# EAGLE board Display_Node (EAGLE 7.2.0)
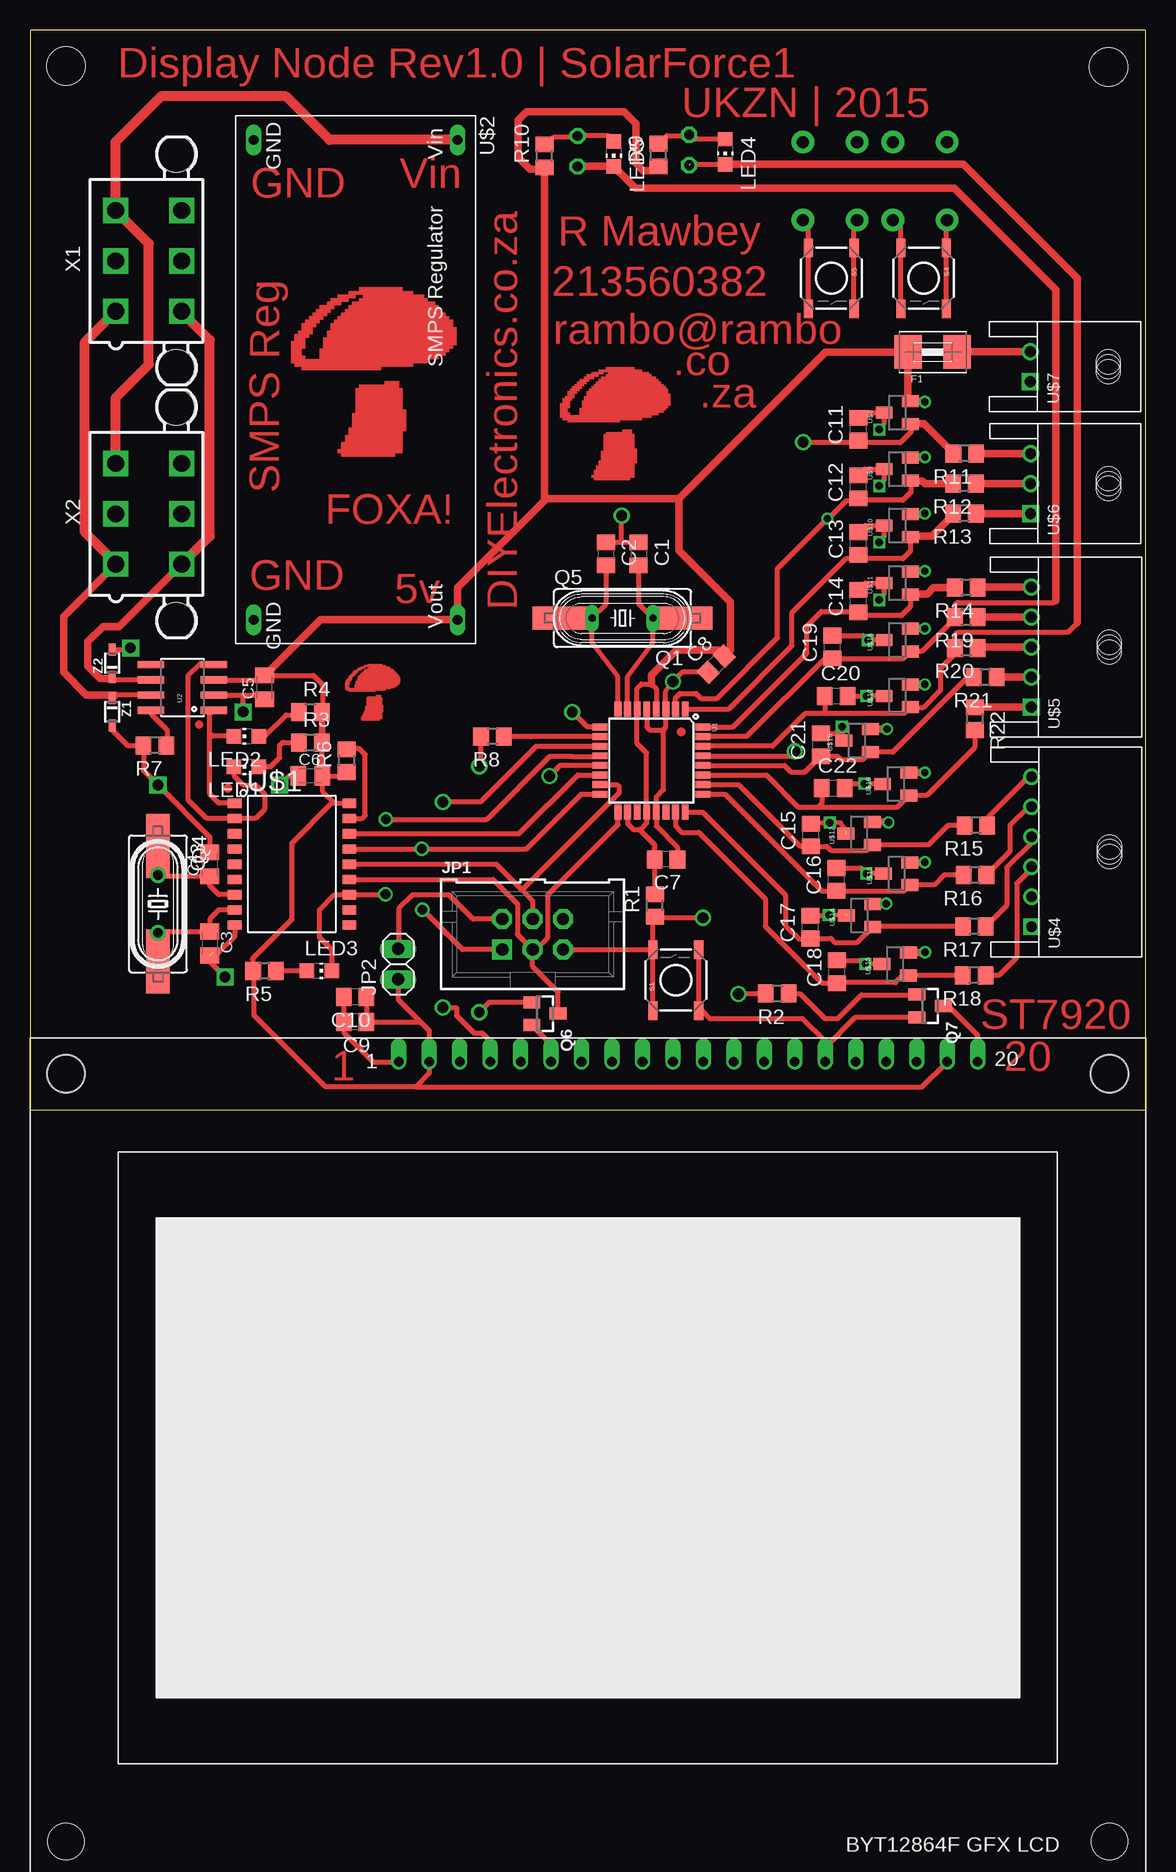
[diagram p0: board, top side]
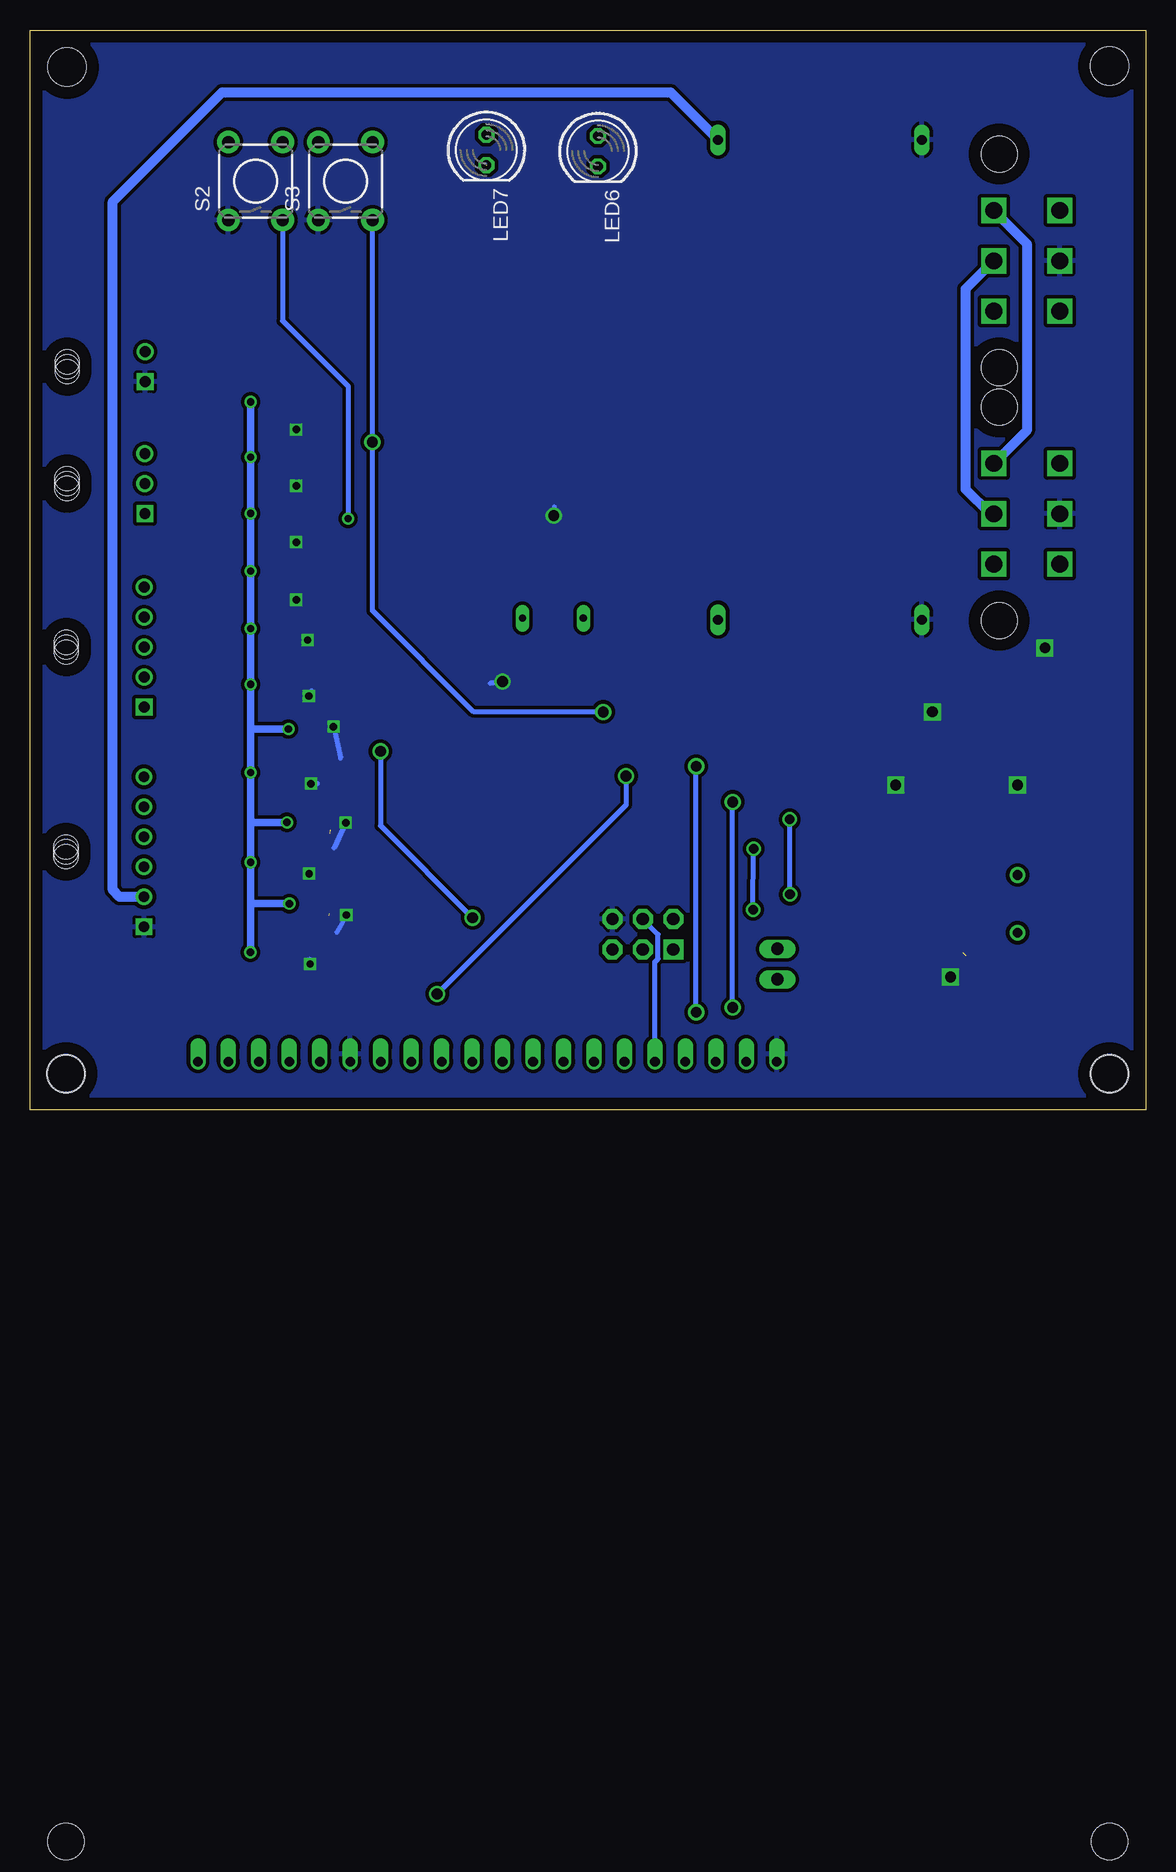
[diagram p1: board, bottom side, seen from below]

Size 93 x 90 mm. Coordinates in mm from the lower left corner, seen from the top.
Outline: 0,0 93,0 93,90 0,90 0,0
Copper layers (1*16): Top 0.035mm / dielectric 1.5mm / Bottom 0.035mm
Design rules "default": minimum track width 10mil, minimum drill 24mil, track to track 8mil, track to pad 8mil, pad to pad 8mil, via to via 8mil, smd to smd 8mil, copper to edge 40mil, drill to drill 8mil, minimum pad ring 10mil, minimum via ring 8mil, stop-mask expansion 4mil, vias tented up to drill 0mil, thermal gap 10mil
Holes 3.2 mm at 3,3 3,87 89.9,86.9 90,3

## Footprints (pad centres in the part's own frame; a part is rotated, then mirrored left to right if it is on the bottom)
C0805 = smd 1.3 x 1.5: 1 -0.95,0; 2 0.95,0
C0805K = smd 1.3 x 1.6: 1 -1,0; 2 1,0
1812 = smd 2.286 x 2.794: 1 -2.046,0; 2 2.046,0
HDR-75869-131 = drill 1.016 pad 1.676 square: 1 -2.54,-1.27 | drill 1.016 pad 1.676 octagon: 2 -2.54,1.27; 3 0,-1.27; 4 0,1.27; 5 2.54,-1.27; 6 2.54,1.27
1X02 = drill 1.016 long: 1 -1.27,0; 2 1.27,0
CHIP-LED0805 = smd 1.2 x 1.2: A 0,-1.05; C 0,1.05
LED5MM = drill 0.813 octagon: A -1.27,0; K 1.27,0
QS = drill 0.61 long: 1 -2.54,0; 2 2.54,0
HC49/S = drill 0.813: 1 -2.413,0; 2 2.413,0
HC49UP = smd 5.334 x 1.93: 1 -4.826,0; 2 4.826,0
SOT23 = smd 1 x 1.4: 1 -0.95,-1.1; 2 0.95,-1.1; 3 0,1.1
R0805 = smd 1.3 x 1.5: 1 -0.95,0; 2 0.95,0
TACTILE_SWITCH_SMD = smd 1.524 x 0.762: 1 -2.54,1.905; 2 2.54,1.905; 3 -2.54,-1.905; 4 2.54,-1.905
TACTILE-PTH = drill 1.016 pad 1.88: 1 -3.251,2.261; 2 3.251,2.261; 3 -3.251,-2.261; 4 3.251,-2.261
TQFP32-08 = smd 1.27 x 0.559: 1 -4.293,2.8; 2 -4.293,2; 3 -4.293,1.2; 4 -4.293,0.4; 5 -4.293,-0.4; 6 -4.293,-1.2; 7 -4.293,-2; 8 -4.293,-2.8; 17 4.293,-2.8; 18 4.293,-2; 19 4.293,-1.2; 20 4.293,-0.4; 21 4.293,0.4; 22 4.293,1.2; 23 4.293,2; 24 4.293,2.8 | smd 0.559 x 1.27: 9 -2.8,-4.293; 10 -2,-4.293; 11 -1.2,-4.293; 12 -0.4,-4.293; 13 0.4,-4.293; 14 1.2,-4.293; 15 2,-4.293; 16 2.8,-4.293; 25 2.8,4.293; 26 2,4.293; 27 1.2,4.293; 28 0.4,4.293; 29 -0.4,4.293; 30 -1.2,4.293; 31 -2,4.293; 32 -2.8,4.293
SO08 = smd 0.61 x 2.21: 1 -1.905,-2.616; 2 -0.635,-2.616; 3 0.635,-2.616; 4 1.905,-2.616; 5 1.905,2.616; 6 0.635,2.616; 7 -0.635,2.616; 8 -1.905,2.616
SO-18W = smd 0.762 x 1.143: 1 -5.08,-4.788; 2 -3.81,-4.788; 3 -2.54,-4.788; 4 -1.27,-4.788; 5 0,-4.788; 6 1.27,-4.788; 7 2.54,-4.788; 8 3.81,-4.788; 9 5.08,-4.788; 10 5.08,4.788; 11 3.81,4.788; 12 2.54,4.788; 13 1.27,4.788; 14 0,4.788; 15 -1.27,4.788; 16 -2.54,4.788; 17 -3.81,4.788; 18 -5.08,4.788
SMPSBOARD = drill 0.8 long: GND 2,1.5; GND@ 42,1.5; VIN 2,18.5; VOUT 42,18.5
BYT12864F = drill 0.8 offset: P$1 14,2; P$2 16.54,2; P$3 19.08,2; P$4 21.62,2; P$5 24.16,2; P$6 26.7,2; P$7 29.24,2; P$8 31.78,2; P$9 34.32,2; P$10 36.86,2; P$11 39.4,2; P$12 41.94,2; P$13 44.48,2; P$14 47.02,2; P$15 49.56,2; P$16 52.1,2; P$17 54.64,2; P$18 57.18,2; P$19 59.72,2; P$20 62.26,2 | hole 3: 3,3; 90,3; 90,67; 3,67
1744426-6 = drill 0.9 square: P$1 -6.25,6.5 | drill 0.9: P$2 -3.75,6.5; P$3 -1.25,6.5; P$4 1.25,6.5; P$5 3.75,6.5; P$6 6.25,6.5 | hole 2: 0,0; -0.4,0; 0.4,0
1744426-5 = drill 0.9 square: P$1 -5,6.5 | drill 0.9: P$2 -2.5,6.5; P$3 0,6.5; P$4 2.5,6.5; P$5 5,6.5 | hole 2: 0,0; -0.4,0; 0.4,0
1744426-3 = drill 0.9 square: P$1 -2.5,6.5 | drill 0.9: P$2 0,6.5; P$3 2.5,6.5 | hole 2: 0,0; -0.4,0; 0.4,0
1744426-2 = drill 0.9 square: P$1 -1.25,6.5 | drill 0.9: P$2 1.25,6.5 | hole 2: 0,0; -0.4,0; 0.4,0
5566-6 = drill 1.4 square: 1 4.2,-2.75; 2 0,-2.75; 3 -4.2,-2.75; 4 4.2,2.75; 5 0,2.75; 6 -4.2,2.75 | hole 3: 8.9,2.29; -8.9,2.29
SOD323 = smd 1 x 0.6: A 1.143,0; C -1.143,0

## Placement (x,y rotation side)
C1  22pF  [C0805]  50.75,46.33 270 top
C2  22pF  [C0805]  48.01,46.33 270 top
C3  22pF  [C0805K]  14.99,13.86 270 top
C4  22pF  [C0805K]  14.99,20.46 90 top
C5  100nF  [C0805K]  19.56,35.19 90 top
C6  100nF  [C0805K]  23.37,27.83 0 top
C7  100nF  [C0805]  53.02,20.88 180 top
C8  100nF  [C0805]  57.21,37.14 45 top
C9  100nF  [C0805]  27.1,7.3 180 top
C10  10uF  [C0805]  27.1,9.4 180 top
C11  10nF  [C0805]  69.05,56.73 90 top
C12  10nF  [C0805]  69.05,51.92 90 top
C13  10nF  [C0805]  69.08,47.2 90 top
C14  10nF  [C0805]  69.08,42.4 90 top
C15  10nF  [C0805]  65.1,22.9 90 top
C16  10nF  [C0805]  67.22,19.2 90 top
C17  10nF  [C0805]  65.05,15.22 90 top
C18  10nF  [C0805]  67.28,11.5 90 top
C19  10nF  [C0805]  66.9,38.58 90 top
C20  10nF  [C0805]  67.2,34.5 0 top
C21  10nF  [C0805]  65.92,30.43 90 top
C22  10nF  [C0805]  66.95,26.8 0 top
F1  [1812]  75.26,63.15 0 top
JP1  AVRISP6  [HDR-75869-131]  41.91,14.62 0 top
JP2  [1X02]  30.69,12.14 90 top
LED1  RX  [CHIP-LED0805]  18.03,28.59 90 top
LED2  TX  [CHIP-LED0805]  18.03,31.13 90 top
LED3  INT  [CHIP-LED0805]  24.13,11.57 270 top
LED4  [CHIP-LED0805]  57.97,79.84 180 top
LED5  [CHIP-LED0805]  48.68,79.67 180 top
LED6  [LED5MM]  45.65,79.9 270 bottom
LED7  [LED5MM]  54.95,80 270 bottom
Q1  16MHz  [QS]  49.4,40.97 180 top
Q3  16MHz  [HC49/S]  10.67,17.16 270 top
Q4  16MHz  [HC49UP]  10.67,17.16 270 top
Q5  16MHz  [HC49UP]  49.4,40.97 0 top
Q6  2N7002  [SOT23]  42.93,8 270 top
Q7  2N7002  [SOT23]  75.05,8.64 270 top
R1  50k  [R0805]  52.09,17.02 90 top
R2  100E  [R0805]  62.3,9.67 180 top
R3  1k  [R0805]  23.37,30.62 0 top
R4  1k  [R0805]  23.37,33.16 0 top
R5  1k  [R0805]  19.56,11.57 180 top
R6  100k  [R0805]  26.42,29.1 90 top
R7  100k  [R0805]  10.41,30.37 180 top
R8  100E  [R0805]  38.56,31.11 180 top
R9  1k  [R0805]  52.39,79.58 90 top
R10  1k  [R0805]  42.88,79.49 90 top
R11  470E  [R0805]  77.92,54.7 180 top
R12  470E  [R0805]  77.9,52.2 180 top
R13  470E  [R0805]  77.9,49.7 180 top
R14  470E  [R0805]  78.05,43.52 180 top
R15  470E  [R0805]  78.85,23.7 180 top
R16  470E  [R0805]  78.78,19.55 180 top
R17  470E  [R0805]  78.72,15.28 180 top
R18  470E  [R0805]  78.7,11.2 180 top
R19  470E  [R0805]  78.05,41.05 180 top
R20  470E  [R0805]  78.05,38.5 180 top
R21  470E  [R0805]  79.62,36.05 180 top
R22  470E  [R0805]  78.75,32.6 270 top
S1  RESET  [TACTILE_SWITCH_SMD]  53.85,10.79 90 top
S2  SWITCH-MOMENTARY-2PTH  [TACTILE-PTH]  74.2,77.4 90 bottom
S3  SWITCH-MOMENTARY-2PTH  [TACTILE-PTH]  66.7,77.4 90 bottom
S4  BTN3  [TACTILE_SWITCH_SMD]  74.5,69.3 270 top
S5  BTN4  [TACTILE_SWITCH_SMD]  66.8,69.3 270 top
U1  ATMEGA328P_TQFP  [TQFP32-08]  51.82,29.1 270 top
U2  MCP2551  [SO08]  12.7,35.19 90 top
U$1  MCP2515SO  [SO-18W]  21.84,20.46 270 top
U$2  SMPSBOARD  [SMPSBOARD]  17.14,82.84 270 top
U$3  BYT12864FLCD  [BYT12864F]  93,6 180 top
U$4  HEADER-6WAY  [1744426-6]  90,21.5 90 top
U$5  HEADER-5WAY  [1744426-5]  89.97,38.55 90 top
U$6  HEADER-3WAY  [1744426-3]  89.92,52.2 90 top
U$7  HEADER-2WAY  [1744426-2]  89.89,61.93 90 top
U$8  DRTR5V0U1SO  [SOT23]  72.3,58.1 90 top
U$9  DRTR5V0U1SO  [SOT23]  72.3,53.4 90 top
U$10  DRTR5V0U1SO  [SOT23]  72.3,48.7 90 top
U$11  DRTR5V0U1SO  [SOT23]  72.3,43.9 90 top
U$12  DRTR5V0U1SO  [SOT23]  69.12,23.02 90 top
U$13  DRTR5V0U1SO  [SOT23]  72.25,19.68 90 top
U$14  DRTR5V0U1SO  [SOT23]  69.15,16.2 90 top
U$15  DRTR5V0U1SO  [SOT23]  72.12,12.15 90 top
U$16  DRTR5V0U1SO  [SOT23]  72.3,39.15 90 top
U$17  DRTR5V0U1SO  [SOT23]  72.3,34.5 90 top
U$18  DRTR5V0U1SO  [SOT23]  68.95,30.77 90 top
U$19  DRTR5V0U1SO  [SOT23]  72.17,27.15 90 top
X1  5566-6  [5566-6]  9.91,70.75 270 top
X2  5566-6  [5566-6]  9.91,49.67 270 top
Z1  TVS-UD-SOD323  [SOD323]  6.86,33.16 270 top
Z2  TVS-UD-SOD323  [SOD323]  6.86,37.23 90 top

## Library data of the parts
C1-C22 R1-R22 = resistor
F1 = adafruit
JP1 = atmel-avr
JP2 = pinhead
LED1-LED7 = led
Q1 = special
Q3 = crystal; OC_FARNELL: 1667008; OC_NEWARK: unknown
Q4 Q5 = crystal; OC_FARNELL: unknown; OC_NEWARK: unknown
Q6 Q7 = transistor-fet
S1-S5 U2 = SparkFun
U1 = SparkFun-DigitalIC; PROD_ID: IC-09069
U$1-U$3 U$8-U$19 = RobThePyro
U$4-U$7 = con-TE-EP
X1 X2 = con-molex; MPN: 95566-61002; OC_FARNELL: unknown; OC_NEWARK: 22K8620
Z1 Z2 = supressor

## Nets
+5V: C5.2 C6.2 C7.2 C8.2 C9.1 C10.1 F1.1 JP2.1 R1.2 R3.2 R4.2 R5.2 R6.1 R9.1 R10.1 U1.4 U1.6 U1.18 U1.20 U2.3 U$1.18 U$2.VOUT U$3.P$2 U$3.P$19 U$8.2 U$9.2 U$10.2 U$11.2 U$12.2 U$13.2 U$14.2 U$15.2 U$16.2 U$17.2 U$18.2 U$19.2
+12V: U$2.VIN U$4.P$2 X1.3 X2.3
A0: C22.1 R22.2 U1.27 U$19.1
A1: C21.1 R21.2 U1.28 U$18.1
BTN1: C14.1 R14.2 U1.32 U$11.1
BTN2: C13.1 R13.2 U1.1 U$10.1
BTN3: C12.1 R12.2 S2.3 S4.3 S4.4 U1.2 U$9.1
BTN4: C11.1 R11.2 S3.3 S5.3 S5.4 U1.9 U$8.1
CANCS: U1.14 U$1.16
CANH: U2.7 X1.1 X2.1 Z1.C
CANINT: LED3.C U1.12 U$1.12
CANL: U2.6 X1.4 X2.4 Z2.C
CANRST: R6.2 U$1.17
CANSTBY: R7.1 U2.8
CRUISE1: C18.1 R18.2 U1.23 U$15.1
CRUISE2: C17.1 R17.2 U1.24 U$14.1
CRUISE3: C16.1 R16.2 U1.25 U$13.1
CRUISE4: C15.1 R15.2 U1.26 U$12.1
GND: C1.1 C2.1 C3.2 C4.2 C5.1 C6.1 C7.1 C8.1 C9.2 C10.2 C11.2 C12.2 C13.2 C14.2 C15.2 C16.2 C17.2 C18.2 C19.2 C20.2 C21.2 C22.2 JP1.6 Q7.2 R7.2 S1.3 S1.4 S2.1 S3.1 S4.1 S4.2 S5.1 S5.2 U1.3 U1.5 U1.21 U2.2 U$1.9 U$2.GND U$2.GND@ U$3.P$6 U$3.P$20 U$4.P$1 U$7.P$1 U$8.3 U$9.3 U$10.3 U$11.3 U$12.3 U$13.3 U$14.3 U$15.3 U$16.3 U$17.3 U$18.3 U$19.3 X1.2 X2.2 Z1.A Z2.A
LCD_CS: U1.11 U$3.P$17
LCD_PWM: R2.2 U1.13
LCD_RST: U$3.P$4
LED1: C20.1 LED4.C LED7.K R20.2 U1.30 U$17.1
LED2: C19.1 LED5.C LED6.K R19.2 U1.31 U$16.1
MISO: JP1.1 U1.16 U$1.15
MOSI: JP1.4 U1.15 U$1.14 U$3.P$16
N$1: C1.2 Q1.1 Q5.2 U1.7
N$2: C2.2 Q1.2 Q5.1 U1.8
N$3: C3.1 Q3.2 Q4.2 U$1.8
N$4: Q7.3 U$3.P$1
N$5: Q7.1 R2.1
N$6: C4.1 Q3.1 Q4.1 U$1.7
N$7: LED1.A R3.1
N$8: LED2.A R4.1
N$9: LED3.A R5.1
N$10: JP1.2 JP2.2
N$11: Q6.2 U$3.P$15
N$12: Q6.1 R8.2
N$13: LED4.A LED7.A R9.2
N$14: X1.5 X2.5
N$15: X1.6 X2.6
N$16: LED5.A LED6.A R10.2
N$17: F1.2 U$7.P$2
N$18: R11.1 U$6.P$3
N$19: R12.1 U$6.P$2
N$20: R13.1 U$6.P$1
N$21: R14.1 U$5.P$5
N$22: R18.1 U$4.P$3
N$23: R17.1 U$4.P$4
N$24: R16.1 U$4.P$5
N$25: R15.1 U$4.P$6
N$26: R19.1 U$5.P$4
N$27: R20.1 U$5.P$3
N$28: R21.1 U$5.P$2
N$29: R22.1 U$5.P$1
RST: JP1.5 R1.1 S1.1 S1.2 U1.29
RXCAN: LED1.C U2.4 U$1.2
SCK: JP1.3 Q6.3 U1.17 U$1.13
SCKCNTRL: R8.1 U1.10
TXCAN: LED2.C U2.1 U$1.1

## Tracks (layer width: path | path; a pad name or v marks a point on that pad's centre or on a via)
+5V  (via drill 0.6)
  Top 0.406: U2.3 19.19,35.83 C5.2 23.64,36.19 24.38,35.45 24.38,31.2 R4.2 R3.2 24.32,27.88 C6.2 | 25.4,25.54 25.15,25.54 21.84,22.24 21.84,15.89 18.54,12.59 18.54,12.06 | 25.4,25.54 U$1.18 | C6.2 24.37,26.57 25.4,25.54 | C6.2 26.1,27.83 R6.1 | 18.54,12.06 18.54,11.64 R5.2 | 32.13,1.91 33.28,3.05 U$3.P$19 33.27,6.6 32.54,7.34 | 32.13,1.91 24.64,1.91 18.67,7.87 18.67,11.94 18.54,12.06 | 32.13,1.91 74.36,1.91 U$3.P$2 | JP2.1 30.69,9.18 32.54,7.34 | U1.4 52.22,35.08 51.82,35.48 50.98,35.48 50.62,35.13 U1.6 50.62,30.53 51.42,29.74 U1.20 51.44,24.79 51.44,23.88 50.93,23.37 50.8,23.37 | U1.18 49.82,23.84 50.29,23.37 50.8,23.37 | R1.2 52.09,21.85 | 52.09,21.85 52.09,22.08 50.8,23.37 | C10.1 C9.1 32.5,7.3 32.54,7.34 | 73.2,63.13 F1.1 | 73.2,59.25 U$8.2 | C7.2 52.08,21.84 52.09,21.85
  Top 0.61: C5.2 24.21,40.84 U$2.VOUT 35.65,43.52 42.88,50.76 | 42.88,50.76 43.05,50.93 54.1,50.93 | F1.1 66.32,63.15 54.1,50.93 | R9.1 52.74,78.28 51.12,78.28 50.5,78.9 50.5,82.2 49.5,83.2 41.4,83.2 40.7,82.5 40.7,79.4 41.7,78.4 42.74,78.4 R10.1 42.88,50.76 | 54.1,50.93 54.1,46.6 58.4,42.3 58.4,38.32 C8.2 57.39,38.3 53.9,38.3 51.82,36.22 51.82,35.48 | 73.2,63.13 73.2,59.25 | U$8.2 74.55,59.05 v74.6,59 | v74.6,54.4 73.45,54.4 U$9.2 | U$10.2 74.55,49.65 v74.6,49.7 | U$11.2 74.55,44.85 v74.6,44.9 | v74.6,40.1 U$16.2 | v74.6,35.45 U$17.2 | v74.6,28.1 U$19.2 | U$18.2 v71.45,31.73 | v74.6,20.62 U$13.2 | U$12.2 71.58,23.98 v71.58,23.95 | v74.62,13.12 73.42,13.12 U$15.2 | U$14.2 71.38,17.15 v71.38,17.18
  Bottom 0.61: v74.6,59 v74.6,54.4 v74.6,49.7 v74.6,44.9 v74.6,40.1 v74.6,35.45 74.6,31.73 | 74.6,31.73 v74.6,28.1 74.6,23.95 | v71.45,31.73 74.6,31.73 | 74.6,23.95 v74.6,20.62 74.62,20.62 74.62,17.18 | v71.58,23.95 74.6,23.95 | 74.62,17.18 v74.62,13.12 | v71.38,17.18 74.62,17.18
+12V
  Top 0.813: X2.3 7.16,59.37 9.91,62.12 9.91,72.2 X1.3 7.11,75 7.11,80.66 10.92,84.47 21.34,84.47 24.96,80.84 U$2.VIN
  Bottom 0.813: U$4.P$2 85.55,17.75 86.1,18.3 86.1,75.7 77,84.8 39.6,84.8 U$2.VIN
A0
  Top 0.406: R22.2 78.75,30.2 74.75,26.2 U$19.1 72.33,25.25 65.72,25.25 | U1.27 61.38,27.9 64.03,25.25 65.72,25.25 | C22.1 66,25.52 65.72,25.25
A1
  Top 0.406: R21.2 78.2,36.05 71.95,29.8 70.08,29.8 U$18.1 69.42,29.2 67.6,29.2 67.33,29.48 C21.1 64.6,28.15 63.45,28.15 62.9,28.7 U1.28
BTN1
  Top 0.406: U$11.1 73.4,41.95 72.62,41.17 69.58,41.17 69.3,41.45 C14.1 69,41.52 65.97,41.52 64.78,40.33 64.78,38.08 58.6,31.9 U1.32
  Top 0.61: R14.2 75.33,43.52 74.8,43 73.45,43 U$11.1
BTN2
  Top 0.406: U$10.1 73.4,46.58 72.95,46.12 72.95,46.1 72.78,45.92 69.4,45.92 | U1.1 58.25,33.4 63.52,38.67 63.52,41.42 68.03,45.92 69.4,45.92 | 69.4,45.92 C13.1
  Top 0.61: R13.2 76.95,49.55 75.2,47.8 73.45,47.8 U$10.1
BTN3  (via drill 0.6)
  Top 0.406: U1.2 53.82,34.32 54.2,34.7 55.52,34.7 55.95,34.27 57.25,34.27 62.33,39.35 62.33,45.12 v66.47,49.27 | S4.4 S4.3 72.59,73.49 S2.3 | 73.45,52.4 73.45,51.5 72.75,50.8 68.65,50.8 68.6,50.75 | 68.6,50.75 68.83,50.75 C12.1 | 68.6,50.75 68.03,50.75 66.53,49.25 66.5,49.27 v66.47,49.27 | 66.53,49.23 v66.47,49.27
  Top 0.61: R12.2 74.6,52.2 74.4,52.4 73.45,52.4 U$9.1
  Bottom 0.406: S2.3 71.94,65.76 66.47,60.3 v66.47,49.27 66.51,49.24
BTN4  (via drill 0.9, 0.9 pad 1.27)
  Top 0.406: U1.9 46.46,31.9 v45.21,33.15 | S5.4 S5.3 64.89,73.69 S3.3 | 73.45,57.2 73.45,56.5 72.55,55.6 69.22,55.6 | 69.22,55.6 C11.1 | 69.22,55.6 64.5,55.6 v64.45,55.65
  Top 0.61: R11.2 76.97,54.73 74.5,57.2 73.45,57.2 U$8.1
  Bottom 0.406: v45.21,33.15 56.01,33.15 56.01,33.16 64.45,41.6 v64.45,55.65 64.45,56.7 64.45,74.14 S3.3
CANCS
  Top 0.406: U1.14 45.67,27.9 40.77,23 U$1.16
CANH
  Top 0.406: U2.7 7.11,34.56 Z1.C
  Top 0.61: 7.11,34.56 4.7,34.56 2.79,36.46 2.79,41.11 X2.1
  Top 0.813: X2.1 7.16,45.56 4.57,48.15 4.57,63.97 X1.1
CANINT  (via drill 0.8)
  Top 0.406: LED3.C 25.18,13.32 24.13,14.37 24.13,16.65 25.4,17.92 U$1.12 28.85,17.92 v29.64,17.95 | U1.12 47.48,29.45 45.16,29.45 45.15,29.44 43.33,29.44 38.09,24.2 v29.67,24.2
  Bottom 0.406: v29.64,17.95 29.64,24.17 v29.67,24.2
CANL
  Top 0.406: U2.6 7.11,35.83 Z2.C
  Top 0.61: X2.4 7.46,40.27 6.1,40.27 4.83,39 4.83,36.97 5.84,35.96 6.73,35.96 Z2.C
  Top 0.813: X2.4 14.99,47.8 14.99,64.15 12.66,66.48 X1.4
CANRST
  Top 0.406: U$1.17 27.69,24.27 27.94,24.53 27.94,29.61 27.43,30.11 26.48,30.11 R6.2
CANSTBY
  Top 0.406: U2.8 10.08,32.98 11.43,31.64 11.43,30.43 R7.1
CRUISE1
  Top 0.406: R18.2 U$15.1 72.75,11.2 72.15,10.6 67.33,10.6 C18.1 67.25,10.57 66,10.57 61.3,15.28 61.3,17.57 55.75,23.12 54.33,23.12 53.82,23.63 U1.23
CRUISE2
  Top 0.406: R17.2 70.28,15.28 U$14.1 68.95,13.95 67.08,13.95 66.75,14.28 C17.1 65,14.22 64.12,14.22 62.98,15.38 62.98,17.9 56.07,24.8 U1.24
CRUISE3
  Top 0.406: R16.2 76.17,19.55 75.38,18.75 73.38,18.75 U$13.1 72.88,18.25 C16.1 | 66.92,18.25 C16.1 | U1.25 57.95,26.3 66,18.25 C16.1
CRUISE4
  Top 0.406: R15.2 76.53,23.7 74.9,22.07 U$12.1 69.78,21.62 66.78,21.62 66.45,21.95 C15.1 65.08,21.98 64.2,21.98 59.08,27.1 U1.26
GND  (via drill 0.6, 0.9 pad 1.27, 0.9 pad 1.42)  (3 unrouted)
  Top 0.406: U2.2 17.78,34.56 | 17.78,34.56 19.19,34.56 C5.1 | U$1.9 17.06,14.4 15.75,13.1 15.22,13.1 | Z1.A 6.86,31.64 8.13,30.37 R7.2 9.46,28.27 v10.67,27.07 14.99,22.75 C4.2 | C6.1 21.59,27.83 v20.83,27.07 | v17.78,33.16 17.78,34.56 | Z2.A 8.26,38.37 v8.38,38.5 | C3.2 14.99,12.33 v16.26,11.06 | C1.1 49.33,47.28 | 49.33,47.28 C2.1 | 66.29,5.21 66.29,5.71 64.39,7.62 56.64,7.62 56.01,8.26 S1.3 S1.4 | 66.29,5.21 U$3.P$6 | Q7.2 68.77,7.69 66.29,5.21 | U1.5 51.44,33.37 51.44,31.9 51.69,31.65 52.78,31.65 | 52.78,31.65 53.02,31.88 U1.3 52.96,33.45 52.96,34.8 53.47,35.69 v53.59,35.69 54.37,36.47 C8.1 | 49.33,47.28 v49.33,49.52 | 52.78,31.65 52.83,31.6 52.83,26.67 52.22,26.05 U1.21 52.22,23.63 53.98,21.88 C7.1 | S5.2 S5.1 68.7,73.89 S3.1 | S4.2 S4.1 76.41,74.09 S2.1 | C10.2 C9.2 26.15,6.45 28.6,4 U$3.P$20 | v70.8,56.7 71.2,57.2 U$8.3 69.47,58.1 C11.2 | U$9.3 71.2,53.1 | U$9.3 71.2,52.5 v70.8,52 | v70.8,47.3 71.2,47.8 U$10.3 69.62,48.7 C13.2 | v70.8,42.5 71.2,43 U$11.3 69.62,43.9 C14.2 | C12.2 69.58,53.4 U$9.3 | 67.65,31.77 v67.7,31.93 | 68,23.3 67.58,23.9 v66.67,23.93 66.17,23.95 C15.2 | 68.03,16.38 67.58,16.2 v66.62,16.23 66.58,16.18 C17.2 | U$13.3 v69.72,19.68 69.25,20.15 C16.2 | U$15.3 v69.65,12.15 69.35,12.45 C18.2 | v69.58,27.18 69.6,27.15 U$19.3 68.25,27.15 C22.2 | U$17.3 69.78,34.5 v69.75,34.48 69.72,34.5 C20.2 | U$16.3 v69.85,39.15 69.47,39.52 C19.2 | C21.2 65.75,31.35 67.12,31.35 v67.7,31.93 | U$18.3 67.85,31.14 67.59,31.41 67.59,31.81 v67.7,31.93
  Bottom 0.406: v53.59,35.69 54.1,35.56 54.61,35.56 | v49.33,49.52 49.28,49.52 49.28,50.23 | v70.8,56.7 70.6,56.5 | v70.8,52 70.6,51.8 | v70.8,47.3 70.6,47.1 | v70.8,42.5 70.6,42.3 | v67.7,31.93 67.12,29.3 | v66.67,23.93 67.65,21.82 | v66.62,16.23 67.42,14.78 | v69.72,19.68 69.72,19.77 69.6,19.9 | v69.65,12.15 69.8,12.43 69.67,12.55 | v69.58,27.18 69.05,27.18 69.03,27.2 | v69.75,34.48 69.75,34.67 69.5,34.92 | v69.85,39.15 69.58,39.15 69.53,39.2
  pour Bottom (isolate 0.305): 0,0 93,0 93,90 0,90
LCD_CS  (via drill 0.9 pad 1.27)
  Top 0.406: U1.11 42.22,30.3 37.57,25.65 v34.42,25.65 | v34.42,8.51 35.56,8.51 35.56,7.84 37,6.4 37.67,6.4 38.35,5.71 U$3.P$17
  Bottom 0.406: v34.42,8.51 v34.42,25.65
LCD_PWM  (via drill 0.9 pad 1.27)
  Top 0.406: U1.13 44.19,28.7 v43.31,27.81 | v59.05,9.65 59.04,9.67 R2.2
  Bottom 0.406: v43.31,27.81 43.31,25.4 v59.05,9.65
LED1  (1 unrouted)
  Top 0.406: U1.30 61.9,30.3 64.65,33.05 66.1,33.05 | 55.01,78.79 LED4.C | 87.3,40.6 87.3,40.58 86.5,39.77 86.47,39.8 77.33,39.8 77.1,39.58 R20.2 77.1,37.98 75.9,36.77 75.9,34.98 74.42,33.5 73.45,33.5 U$17.1 72.9,33.05 66.1,33.05 | C20.1 66.25,33.2 66.1,33.05
  Top 0.61: LED4.C 77.81,78.79 87.3,69.3 87.3,40.6
LED2
  Top 0.406: U1.31 56.14,31.13 59.78,31.13 66.22,37.58 66.85,37.58 C19.1 72.83,37.62 U$16.1 74.35,38.2 77.1,40.95 R19.2 77.1,42.05 77.33,42.27 85.38,42.27 85.53,42.42
  Top 0.61: LED6.K LED5.C 50.48,76.83 77.08,76.83 85.53,68.38 85.53,42.42
MISO  (via drill 0.8)
  Top 0.406: U1.16 45.97,26.3 41.41,21.74 v32.67,21.74 v32.66,21.73 U$1.15 | JP1.1 36.04,13.35 v32.72,16.68
  Bottom 0.406: v32.72,16.68 32.69,21.73 v32.67,21.74
MOSI
  Top 0.406: U1.15 48.97,27.1 49.12,26.94 49.12,26.41 41.02,18.3 | U$1.14 38.86,20.46 41.02,18.3 | 41.02,18.3 41.91,17.41 JP1.4
  Bottom 0.406: U$3.P$16 40.9,12.31 40.64,12.57 40.64,14.62 JP1.4
N$1
  Top 0.406: U1.7 49.82,36.12 51.94,38.94 Q1.1 | C1.2 50.75,42.17 Q1.1 | Q1.1 51.97,40.97 52,41 51.9,41 | Q5.2 Q1.1
N$2
  Top 0.406: U1.8 49.02,36.09 46.86,38.94 Q1.2 | C2.2 48.01,42.12 Q1.2 | Q5.1 Q1.2
N$3
  Top 0.406: Q4.2 Q3.2 10.67,14.86 C3.1 14.99,15.89 15.75,16.65 U$1.8
N$4
  Top 0.406: U$3.P$1 79,6.19 76.55,8.64 Q7.3
N$5
  Top 0.406: R2.1 64.18,9.67 66.25,7.6 67.35,7.6 69.33,9.57 73.94,9.57 Q7.1
N$6
  Top 0.406: Q4.1 Q3.1 10.67,19.46 C4.1 14.99,18.68 15.75,17.92 U$1.7
N$7
  Top 0.406: LED1.A 20.07,28.59 20.83,29.35 20.83,30.37 21.08,30.62 R3.1
N$8
  Top 0.406: LED2.A 19.56,31.13 21.34,32.91 22.16,32.91 R4.1
N$9
  Top 0.406: LED3.A R5.1
N$10
  Top 0.406: JP1.2 36.94,15.89 34.92,17.91 31.88,17.91 30.73,16.76 30.73,13.45 JP2.2
N$11
  Top 0.406: U$3.P$15 43.44,5.44 Q6.2
N$12  (via drill 0.9 pad 1.27)
  Top 0.406: Q6.1 38.29,8.95 v37.47,8.13 | v37.47,28.63 37.61,28.77 R8.2
  Bottom 0.406: v37.47,8.13 v37.47,28.63
N$13
  Top 0.406: R9.2 52.42,80.53 53.1,81.2 54.88,81.2 LED7.A 55.33,80.89 LED4.A
N$14
  Bottom 0.813: X2.5 12.95,49.67 14.99,51.7 14.99,68.42 X1.5
N$15
  Bottom 0.813: X1.6 9.91,72.2 9.91,56.62 X2.6
N$16
  Top 0.406: R10.2 43.04,80.44 43.7,81.1 45.58,81.1 LED6.A 48.23,81.17 LED5.A
N$17
  Top 0.61: U$7.P$2 77.33,63.18 F1.2
N$18
  Top 0.61: U$6.P$3 R11.1
N$19
  Top 0.61: U$6.P$2 R12.1
N$20
  Top 0.61: U$6.P$1 R13.1
N$21
  Top 0.406: 78.93,43.55 R14.1
  Top 0.61: U$5.P$5 79.07,43.55 R14.1
N$22
  Top 0.406: U$4.P$3 83.5,20.12 82.25,18.88 82.25,12.7 80.75,11.2 R18.1
N$23
  Top 0.406: U$4.P$4 83.5,22.25 81.42,20.18 81.42,17.02 R17.1
N$24
  Top 0.406: U$4.P$5 83.25,25.25 81.7,23.7 81.7,21.52 R16.1
N$25
  Top 0.406: U$4.P$6 83.22,27.75 79.92,24.45 79.92,23.82 R15.1
N$26
  Top 0.61: R19.1 U$5.P$4
N$27
  Top 0.406: 79,38.55 R20.1
  Top 0.61: U$5.P$3 79,38.55
N$28
  Top 0.406: R21.1
  Top 0.61: U$5.P$2 R21.1
N$29
  Top 0.406: R22.1
  Top 0.61: U$5.P$1 R22.1
RST  (via drill 0.9)
  Top 0.406: JP1.5 51.93,13.35 S1.2 | S1.1 S1.2 | S1.2 51.94,15.93 R1.1 52.15,16 v56.1,16 | U1.29 63.4,29.5 v63.77,29.88
  Bottom 0.406: v63.77,29.88 63.77,23.68 v56.1,16
RXCAN
  Top 0.406: LED1.C 16.98,27.86 17.78,27.07 18.8,27.07 19.56,26.3 19.56,25.03 18.8,24.27 U$1.2 14.73,24.27 13.21,25.8 13.21,36.21 14.22,37.23 15.19,37.23 U2.4
SCK
  Top 0.406: 49,24.79 U1.17 49.02,24.8 49.02,23.76 43.18,17.92 43.18,14.37 42.16,13.35 JP1.3 | U$1.13 38.61,19.19 40.64,17.16 40.64,14.62 JP1.3 | JP1.3 41.91,11.94 44.03,9.82 Q6.3
SCKCNTRL
  Top 0.406: U1.10 41.73,31.1 R8.1
TXCAN
  Top 0.406: U$1.1 15.75,25.54 14.99,26.3 14.99,31.38 | 14.99,31.38 14.99,32.96 U2.1 | LED2.C 15.24,31.13 14.99,31.38
(copper drawn outside any net)
  shapes: Top area x186, Top circle x3

## Text on the board
Top: Display Node Rev1.0 | SolarForce1 | UKZN | 2015 | Vin | GND | DIYElectronics.co.za | R Mawbey | 213560382 | rambo@rambo | .co | .za | SMPS Reg | FOXA! | GND | 5v | ST7920 | 20 | 1